# Altium PCB PCB1.pcbdoc
Units mil, origin at the board's own origin, x right, y up, seen from the top; angles counter-clockwise.
Board outline 1051.18 x 4487.6 mil, 2 copper layers (Top Layer, Bottom Layer); 40 components, 26 nets, 135 pads, 41 vias.
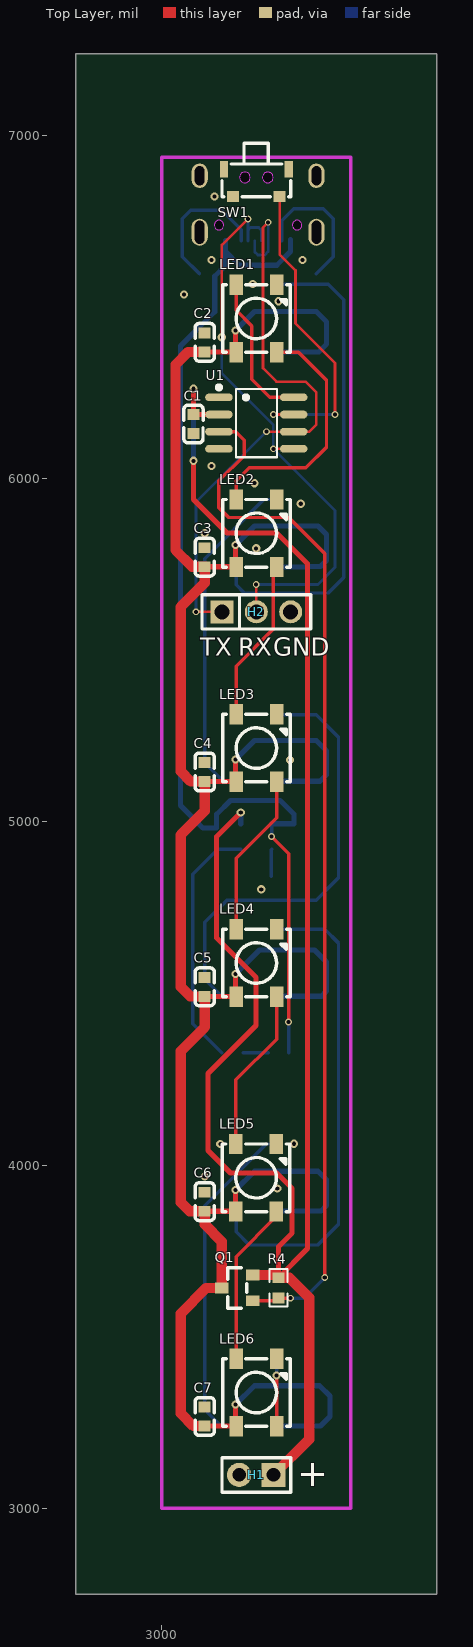
[diagram p0: Top Layer view]
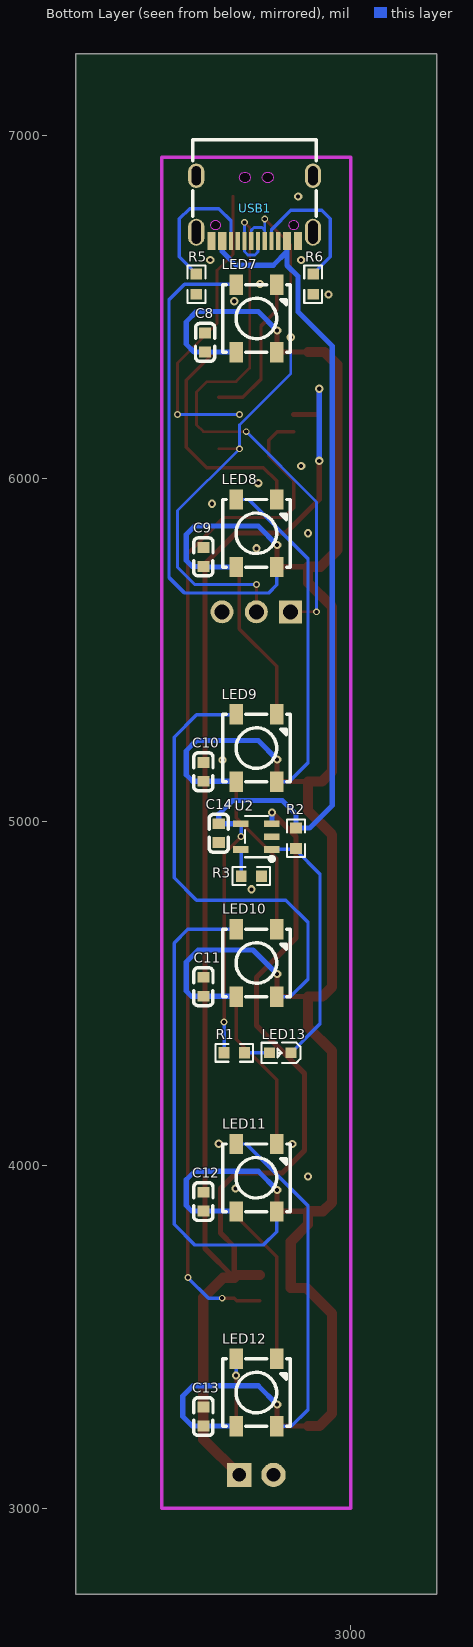
[diagram p1: Bottom Layer view, seen from below]

## Layer stack, top to bottom
Top Layer: signal copper (thickness not stored)
Dielectric: dielectric 12.6, FR-4, Dk 4.8
Bottom Layer: signal copper (thickness not stored)

## Board outline
3801.18,2750 2750,2750 2750,7237.6 3801.18,7237.6

## Components (designator, comment, footprint, x,y, rotation, side; value= is the part's Value field where it differs from the comment)
C1 "CAP_0603" C0603 3092.44,6159.57 r90 top
C2 "CAP_0603" C0603 3125,6397.01 r270 top
C3 "CAP_0603" C0603 3125,5771.01 r270 top
C4 "CAP_0603" C0603 3125,5145.01 r270 top
C5 "CAP_0603" C0603 3125,4519.01 r270 top
C6 "CAP_0603" C0603 3125,3893.01 r270 top
C7 "CAP_0603" C0603 3125,3267.01 r270 top
C8 "CAP_0603" C0603 3425,6397.01 r270 bottom
C9 "CAP_0603" C0603 3430,5772.01 r270 bottom
C10 "CAP_0603" C0603 3430,5145.76 r270 bottom
C11 "CAP_0603" C0603 3430,4519.51 r270 bottom
C12 "CAP_0603" C0603 3430,3893.26 r270 bottom
C13 "CAP_0603" C0603 3430,3267.01 r270 bottom
C14 "CAP_0603" C0603 3385,4967.01 r90 bottom
H1 "HDR-M_2.54_1x2P" HDR-TH_2P-P2.54-V-M-1 3275.59,3097.01 r180 top
H2 "HDR-M_2.54_1x3P" HDR-TH_3P-P2.54-V-M 3275.59,5612.01 r0 top
LED1 "XL-5050RGBC-WS2812B" LED-SMD_4P-L5.0-W5.0-BL_XL-5050RGBC 3275.59,6467.01 r0 top
LED2 "XL-5050RGBC-WS2812B" LED-SMD_4P-L5.0-W5.0-BL_XL-5050RGBC 3275.59,5841.01 r0 top
LED3 "XL-5050RGBC-WS2812B" LED-SMD_4P-L5.0-W5.0-BL_XL-5050RGBC 3275.59,5215.01 r0 top
LED4 "XL-5050RGBC-WS2812B" LED-SMD_4P-L5.0-W5.0-BL_XL-5050RGBC 3275.59,4589.01 r0 top
LED5 "XL-5050RGBC-WS2812B" LED-SMD_4P-L5.0-W5.0-BL_XL-5050RGBC 3275,3963.01 r0 top
LED6 "XL-5050RGBC-WS2812B" LED-SMD_4P-L5.0-W5.0-BL_XL-5050RGBC 3275.59,3337.01 r0 top
LED7 "XL-5050RGBC-WS2812B" LED-SMD_4P-L5.0-W5.0-BL_XL-5050RGBC 3275.59,6467.01 r180 bottom
LED8 "XL-5050RGBC-WS2812B" LED-SMD_4P-L5.0-W5.0-BL_XL-5050RGBC 3275.59,5841.01 r180 bottom
LED9 "XL-5050RGBC-WS2812B" LED-SMD_4P-L5.0-W5.0-BL_XL-5050RGBC 3275.59,5215.01 r180 bottom
LED10 "XL-5050RGBC-WS2812B" LED-SMD_4P-L5.0-W5.0-BL_XL-5050RGBC 3275.59,4589.01 r180 bottom
LED11 "XL-5050RGBC-WS2812B" LED-SMD_4P-L5.0-W5.0-BL_XL-5050RGBC 3275.59,3963.01 r180 bottom
LED12 "XL-5050RGBC-WS2812B" LED-SMD_4P-L5.0-W5.0-BL_XL-5050RGBC 3275.59,3337.01 r180 bottom
LED13 "LED_0603-R" LED_0603 3207.9,4326.81 r0 bottom
Q1 "AO3401A_P" AO3401A_SOT-23-3 3220,3642.01 r0 top
R1 "Res_0603" R0603 3340,4327.01 r180 bottom
R2 "Res_0603" R0603 3160,4952.01 r270 bottom
R3 "Res_0603" R0603 3290,4842.01 r0 bottom
R4 "Res_0603" R0603 3340,3642.01 r90 top
R5 "Res_0603" R0603 3450.34,6567.01 r90 bottom
R6 "Res_0603" R0603 3110,6567.01 r90 bottom
SW1 "TS-KG86E-ACT35F" SW-SMD_TS-KG86EV-ART35 3275.59,6862.01 r0 top
U1 "STC8G1K08-36I-SOP8" SOP-8_L5.0-W4.0-P1.27-LS6.0-BL 3275.59,6162.01 r270 top
U2 "LTC4054ES5-4.2#PBF" SOT-23-5_L3.0-W1.7-P0.95-LS2.8-BL 3275.59,4957.01 r90 bottom
USB1 "USB_TYPE-C-16P" USB_TYPE-C-16P 3275.59,6787.6 r0 bottom

## Footprints (in the part's own frame and the unit in brackets; to place one, negate y for a bottom-side part, rotate by r counter-clockwise, add the part's x,y. Pads: shape width x height; smd on the part's side, far side on the other; paste and mask are expansions set on the pad)
AO3401A_SOT-23-3 [mm]
  rect 1x0.8 smd: 1(1.15,-0.95) 2(1.15,0.95) 3(-1.15,0)
  silkscreen extent -0.7,-1.5 0.7,1.5
C0603 [mm]
  rect 0.8x0.9 smd: 1(-0.7,0) 2(0.7,0)
  silkscreen extent -1.41,-0.71 1.39,0.72
HDR-TH_2P-P2.54-V-M-1 [mm]
  rect 1.8x1.8 hole 1: 1(-1.27,0)
  round 1.8 hole 1: 2(1.27,0)
  silkscreen extent -2.54,-1.27 2.54,1.27
HDR-TH_3P-P2.54-V-M [mm]
  rect 1.7x1.7 hole 1.1: 1(-2.54,0)
  round 1.7 hole 1.1: 2(0,0) 3(2.54,0)
  silkscreen extent -4.02,-1.27 4.02,1.27
LED-SMD_4P-L5.0-W5.0-BL_XL-5050RGBC [mm]
  rect 1x1.5 smd: 1(-1.5,-2.5) 2(1.5,-2.5) 3(1.5,2.5) 4(-1.5,2.5)
  silkscreen extent -2.5,-2.5 2.5,2.5
LED_0603 [mil]
  rect 31.5x31.5 smd: 1(-33.5,-0.4) 2(29.5,-0.2)
  silkscreen extent -61,-30 53,30
R0603 [mil]
  rect 31.75x34.02 smd: 1(-29.66,0) 2(29.66,0)
  silkscreen extent -55,-26 55,26
SOP-8_L5.0-W4.0-P1.27-LS6.0-BL [mil]
  oval 22.6x80.14 smd: 1(-75,-108.97) 2(-25,-108.97) 3(25,-108.97) 4(75,-108.97) 5(75,108.97) 6(25,108.97) 7(-25,108.97) 8(-75,108.97)
  silkscreen extent -110,-115 99,60
SOT-23-5_L3.0-W1.7-P0.95-LS2.8-BL [mm]
  rect 0.49x1.157 smd: 1(-0.95,-1.154) 2(0,-1.154) 3(0.95,-1.154)
  rect 0.49x1.175 smd: 4(0.95,1.154) 5(-0.95,1.154)
  silkscreen extent -1.8,-1.29 1.53,0.85
SW-SMD_TS-KG86EV-ART35 [mm]
  rect 0.9x0.8 smd: 1(-1.725,-1) 2(1.725,-1)
  rect 0.6x1.2 smd: 3(-2.4,1) 4(2.4,1)
  Multi-Layer board cut-out: -0.45,0.4 -0.489,0.574 -0.6,0.713 -0.761,0.79 -0.939,0.79 -1.099,0.713 -1.21,0.574 -1.25,0.4 -1.25,0.4 -1.21,0.227 -1.099,0.087 -0.939,0.01 -0.761,0.01 -0.601,0.087 -0.49,0.226 -0.45,0.4
  Multi-Layer board cut-out: 1.25,0.4 1.211,0.574 1.1,0.713 0.939,0.79 0.761,0.79 0.601,0.713 0.49,0.574 0.45,0.4 0.45,0.4 0.49,0.227 0.601,0.087 0.761,0.01 0.939,0.01 1.1,0.087 1.211,0.226 1.25,0.4
  Multi-Layer keep-out region: -0.45,0.4 -0.489,0.574 -0.6,0.713 -0.761,0.79 -0.939,0.79 -1.099,0.713 -1.21,0.574 -1.25,0.4 -1.25,0.4 -1.21,0.227 -1.099,0.087 -0.939,0.01 -0.761,0.01 -0.601,0.087 -0.49,0.226 -0.45,0.4
  Multi-Layer keep-out region: 1.25,0.4 1.211,0.574 1.1,0.713 0.939,0.79 0.761,0.79 0.601,0.713 0.49,0.574 0.45,0.4 0.45,0.4 0.49,0.227 0.601,0.087 0.761,0.01 0.939,0.01 1.1,0.087 1.211,0.226 1.25,0.4
  silkscreen extent -2.54,-1.02 2.54,2.92
USB_TYPE-C-16P [mm]
  oval 1.2x2 hole 0.7 slot 1.7 at 90 deg: 1(-4.193,1.765) 2(4.447,1.765)
  oval 1.2x1.8 hole 0.7 slot 1.4 at 90 deg: 3(-4.193,-2.415) 4(4.447,-2.415)
  rect 0.3x1.3 smd: A1(-3.223,2.415) A4(-2.423,2.415) A5(-1.123,2.415) A6(-0.123,2.415) A7(0.377,2.415) A8(1.377,2.415) A9(2.677,2.415) A12(3.477,2.415) B1(3.177,2.415) B4(2.377,2.415) B5(1.877,2.415) B6(0.877,2.415) B7(-0.623,2.415) B8(-1.623,2.415) B9(-2.123,2.415) B12(-2.923,2.415)
  Multi-Layer board cut-out: -2.413,1.235 -2.448,1.083 -2.545,0.961 -2.685,0.894 -2.841,0.894 -2.981,0.961 -3.078,1.083 -3.113,1.235 -3.113,1.235 -3.066,1.41 -2.938,1.538 -2.763,1.585 -2.588,1.538 -2.46,1.41 -2.413,1.235
  Multi-Layer board cut-out: 3.367,1.235 3.332,1.083 3.235,0.961 3.095,0.894 2.939,0.894 2.799,0.961 2.702,1.083 2.667,1.235 2.667,1.235 2.714,1.41 2.842,1.538 3.017,1.585 3.192,1.538 3.32,1.41 3.367,1.235
  Multi-Layer keep-out region: -2.413,1.235 -2.448,1.083 -2.545,0.961 -2.685,0.894 -2.841,0.894 -2.981,0.961 -3.078,1.083 -3.113,1.235 -3.113,1.235 -3.066,1.41 -2.938,1.538 -2.763,1.585 -2.588,1.538 -2.46,1.41 -2.413,1.235
  Multi-Layer keep-out region: 3.367,1.235 3.332,1.083 3.235,0.961 3.095,0.894 2.939,0.894 2.799,0.961 2.702,1.083 2.667,1.235 2.667,1.235 2.714,1.41 2.842,1.538 3.017,1.585 3.192,1.538 3.32,1.41 3.367,1.235
  silkscreen extent -4.45,-5.08 4.7,0.57

## Via types
v1: diameter 24.02, hole 12.01, Top Layer to Bottom Layer, 29 vias
v2: diameter 19.68, hole 11.81, Top Layer to Bottom Layer, 12 vias

## Nets (pads, with @x,y where several pads share a name; then routed paths per layer and width w, separated by ;. In a path a pad name is that pad's centre, name@x,y a point inside that pad or via, vN(x,y) a via of type N, cw(c..) or ccw(c..) an arc to the next point about the centre after c; other vN are vias at no path point)
$1N498: R3.2 U2.5 | length 78.2
  Bottom Layer w10: R3.2 3319.66,4918.26 U2.5
$1N559: LED13.2 R1.2 | length 72.9
  Bottom Layer w10: LED13.2 R1.2
$1N577: LED13.1 R2.2 U2.1 | length 728.8
  Bottom Layer w10: R2.2 R2.2@3162.74,4919.61 ; LED13.1 3090,4411.61 3090,4846.87 R2.2@3162.74,4919.61 ; U2.1 R2.2@3162.74,4919.61
$1N1367: LED4.2 LED5.4 | length 478.3
  Top Layer w10: LED5.4 3215.95,4247.96 3334.64,4366.65 LED4.2
$1N1526: LED2.2 LED3.4 | length 478.1
  Top Layer w10: LED3.4 3216.54,5453.55 3325,5562.01 3325,5732.94 LED2.2
$1N1539: LED3.2 LED4.4 | length 478.1
  Top Layer w10: LED4.4 3216.54,4893.55 3334.64,5011.65 LED3.2
$1N1823: LED8.4 LED9.2 | length 990.6
  Bottom Layer w10: LED9.2 3180.43,5116.58 3125,5172.01 3125,5767.01 3297.43,5939.43 LED8.4
$1N1839: LED10.4 LED11.2 | length 1415.5
  Bottom Layer w10: LED11.2 3216.54,3805.47 3255,3767.01 3455,3767.01 3515,3827.01 3515,4647.01 3475,4687.01 3335.07,4687.01 LED10.4
$1N1846: LED9.4 LED10.2 | length 1339.6
  Bottom Layer w10: LED10.2 3176.43,4490.58 3125,4542.01 3125,4707.01 3190,4772.01 3450,4772.01 3515,4837.01 3515,5247.01 3450,5312.01 3336.07,5312.01 LED9.4
$1N1960: LED1.2 LED2.4 | length 732.5
  Top Layer w10: LED2.4 3216.54,5993.55 3255,6032.01 3420,6032.01 3480,6092.01 3480,6287.01 3398.43,6368.58 LED1.2
$1N2043: LED7.4 LED8.2 | length 1418.6
  Bottom Layer w10: LED8.2 3216.54,5690.47 3240,5667.01 3485,5667.01 3530,5712.01 3530,6522.01 3485,6567.01 3336.22,6567.01 LED7.4
$1N3699: R6.2 USB1.A5 | length 419.2
  Bottom Layer w10: R6.2 3060,6646.67 3060,6757.01 3085,6782.01 3175,6782.01 3231.38,6725.63 USB1.A5
$1N3708: R5.2 USB1.B5 | length 417.5
  Bottom Layer w10: USB1.B5 3349.49,6751.5 3385,6787.01 3470,6787.01 3500,6757.01 3500,6646.33 R5.2
$1N6521: LED5.2 LED6.4 | length 477.8
  Top Layer w10: LED6.4 3216.54,3732.93 3334.05,3850.44 LED5.2
$1N6607: LED6.2 LED12.4 | length 196.8
  Top Layer w10: LED6.2 v1(3334.64,3387.01)
  Bottom Layer w10: v1(3334.64,3387.01) LED12.4
$1N6709: LED11.4 LED12.2 | length 990.6
  Bottom Layer w10: LED12.2 3173.43,3238.58 3125,3287.01 3125,3882.01 3304.43,4061.43 LED11.4
+5V: C14.2 R1.1 R2.1 U2.4 USB1.A4 USB1.A9 USB1.B4 USB1.B9 | length 3168.8
  Top Layer w10: v2(3320,4957.01) 3369.66,4907.35 v2(3369.66,4417.01)
  Bottom Layer w10: v2(3320,4957.01) 3320,4993.4 U2.4 ; R1.1 v2(3369.66,4417.01)
  Bottom Layer w15: USB1.A4@3185.85,6672.87 USB1.A4@3186.04,6672.68 ; USB1.A4@3186.04,6693.27 USB1.A4@3186.04,6672.68 ; U2.4 3384.84,4994.41 C14.2 3385,5022.01 3345,5062.01 3200,5062.01 3160,5022.01 R2.1 3120.34,4981.67 3054.49,5047.52 3054.49,6386.5 3154.39,6486.4 3154.39,6589.75 3186.04,6621.4 3186.04,6662.02 ; USB1.B4@3374.96,6696.81 3374.96,6661.6 3335.36,6622.01 3226.05,6622.01 3186.04,6662.02 ; 3186.04,6662.02 USB1.A4@3186.04,6672.68
GND: C1.1 C2.1 C3.1 C4.1 C5.1 C6.1 C7.1 C8.1 C9.1 C10.1 C11.1 C12.1 C13.1 C14.1 H1.2 H2.3 LED1.3 LED2.3 LED3.3 LED4.3 LED5.3 LED6.3 LED7.3 LED8.3 LED9.3 LED10.3 LED11.3 LED12.3 R3.1 R5.1 R6.1 SW1.1 U1.4 U2.2 USB1.A1 USB1.A12 USB1.B1 USB1.B12
  other v1: 3336.61,3932.01 3125,3967.01 3170.78,4061.41 3385,4062.01 3290,4803.42 3374.02,5180.26 3275,5797.01 3125.11,5840.96 3405,5927.01 3270,5987.01 3145,6037.01 3340,6517.01 3065,6537.01 3265,6567.01 3145,6637.01 3410,6637.01 3410,6637.01 3153.66,6822.64
PWR: Q1.1 R4.1 U1.3 | length 3022.3
  Top Layer w10: U1.3 3215,6137.01 3240,6112.01 3240,6067.01 3166.62,5993.63 3166.62,5915.39 3195,5887.01 3370,5887.01 3475,5782.01 v2(3475,3672.01) ; Q1.1 3332.26,3604.61 R4.1 3340.34,3612.01 v2(3375,3612.01)
  Bottom Layer w10: v2(3375,3612.01) 3415,3612.01 v2(3475,3672.01)
RGB: LED1.4 U1.8 | length 438.8
  Top Layer w10: LED1.4 3216.54,6490.47 3262,6445.01 3262,6290.01 3315,6237.01 U1.8
RXD: H2.2 U1.5 USB1.A7 USB1.B7 | length 1715.7
  Top Layer w8: v1(3175,6412.01) 3175,6680.95 v2(3251.06,6757.01) ; v2(3275,5692.01) 3275,5612.6 H2.2 ; v2(3325,6087.01) U1.5
  Bottom Layer w8: v1(3175,6412.01) 3175,6307.01 3325,6157.01 v2(3325,6087.01) 3505,5907.01 3505,5742.01 3455,5692.01 v2(3275,5692.01) ; USB1.B7 3251.06,6724.01 ; v2(3251.06,6757.01) 3251.06,6724.01 ; USB1.A7 3290.43,6724.01 3282.43,6732.01 3259.06,6732.01 3251.06,6724.01
SW: SW1.2 U1.7 | length 942.1
  Top Layer w8: v2(3325,6187.01) U1.7 ; SW1.2 3343.5,6653.51 3390,6607.01 3390,6452.01 3505,6337.01 v2(3505,6187.01)
  Bottom Layer w8: v2(3325,6187.01) v2(3505,6187.01)
TXD: H2.1 U1.6 USB1.A6 USB1.B6 | length 1712.7
  Top Layer w8: v2(3100,5612.01) H2.1 ; v2(3305,6137.01) U1.6 3430,6137.01 3450,6157.01 3450,6252.01 3419.34,6282.67 3334.34,6282.67 3295,6322.01 3295,6732.01 v2(3310,6747.01)
  Bottom Layer w8: v2(3100,5612.01) 3100,5932.01 v2(3305,6137.01) ; USB1.A6 3270.75,6661.26 3280,6652.01 3300.28,6652.01 3310.12,6661.85 USB1.B6 3310.12,6746.89 v2(3310,6747.01)
VBAT: C1.2 H1.1 Q1.2 R4.2 U1.2 U2.3 | length 5469
  Top Layer w15: v1(3092.44,6052.01) 3092.44,5939.57 3190,5842.01 3335,5842.01 3425,5752.01 3425,3756.67 R4.2 3340,3762.01 3380,3802.01 3380,3932.01 3335,3977.01 3200,3977.01 3135,4042.01 3135,4267.01 3275,4407.01 3275,4547.01 3160,4662.01 3160,4957.01 v1(3230,5027.01) ; v1(3092.44,6262.01) C1.2 3166.5,6187.13 U1.2
  Top Layer w30: Q1.2 3332.26,3679.41 R4.2 3372.01,3671.67 3430,3613.68 3430,3201.42 H1.1
  Bottom Layer w15: v1(3092.44,6052.01) v1(3092.44,6262.01) ; v1(3230,5027.01) 3230,4994.58 U2.3
VCC: C2.2 C3.2 C4.2 C5.2 C6.2 C7.2 C8.2 C9.2 C10.2 C11.2 C12.2 C13.2 LED1.1 LED2.1 LED3.1 LED4.1 LED5.1 LED6.1 LED7.1 LED8.1 LED9.1 LED10.1 LED11.1 LED12.1 Q1.3 | length 7754.3
  Top Layer w15: C7.2 LED6.1@3215.68,3239.45 ; C6.2 LED5.1@3215.09,3865.45 ; C5.2 LED4.1@3215.68,4491.45 ; C4.2 LED3.1@3215.68,5117.45 ; C3.2 LED2.1@3215.68,5743.45 ; C2.2 LED1.1@3215.68,6369.45 ; v1(3215,3302.01) 3215,3240.12 LED6.1@3215.68,3239.45 ; v1(3215,3927.01) 3215.09,3926.92 LED5.1@3215.09,3865.45 ; v1(3215,4557.01) 3215,4492.12 LED4.1@3215.68,4491.45 ; v1(3215,5182.01) 3215,5118.12 LED3.1@3215.68,5117.45 ; v1(3215,5807.01) 3215,5744.12 LED2.1@3215.68,5743.45 ; v1(3215,6432.01) 3215,6370.12 LED1.1@3215.68,6369.45 ; LED5.1 LED5.1@3215.09,3865.45 ; LED6.1 LED6.1@3215.68,3239.45 ; LED4.1 LED4.1@3215.68,4491.45 ; LED3.1 LED3.1@3215.68,5117.45 ; LED2.1 LED2.1@3215.68,5743.45 ; LED1.1 LED1.1@3215.68,6369.45
  Top Layer w30: C7.2 3092.28,3239.45 3055,3276.73 3055,3567.01 3130,3642.01 Q1.3 3175,3642.29 3175,3777.01 3125,3827.01 C6.2 3081.56,3865.45 3055,3892.01 3055,4332.01 3125,4402.01 C5.2 3082.57,4491.45 3055,4519.02 3055,4962.01 3125,5032.01 C4.2 3085,5117.45 3055,5147.45 3055,5626.29 3125,5696.29 C3.2 3088.56,5743.45 3040,5792.01 3040,6332.01 3077.44,6369.45 C2.2
  Bottom Layer w15: v1(3215,3302.01) 3270,3357.01 3460,3357.01 3490,3327.01 3490,3267.01 3462.44,3239.45 C13.2 3335.51,3239.45 LED12.1 ; v1(3215,3927.01) 3270,3982.01 3455,3982.01 3480,3957.01 3480,3882.01 3463.69,3865.7 C12.2 3335.76,3865.7 LED11.1 ; v1(3215,4557.01) 3285,4627.01 3445,4627.01 3480,4592.01 3480,4506.95 3465,4491.95 C11.2 3336.01,4491.95 LED10.1 ; v1(3215,5182.01) 3270,5237.01 3450,5237.01 3480,5207.01 3480,5137.01 3461.19,5118.2 C10.2 3336.26,5118.2 LED9.1 ; v1(3215,5807.01) 3270,5862.01 3455,5862.01 3480,5837.01 3480,5762.01 3462.44,5744.45 C9.2 3428.14,5742.58 LED8.1 ; v1(3215,6432.01) 3270,6487.01 3450,6487.01 3480,6457.01 3480,6392.01 3457.44,6369.45 C8.2 3335.51,6369.45 LED7.1
"": LED7.2 SW1.3 SW1.4 U1.1 USB1.1 USB1.2 USB1.3 USB1.4 USB1.A8 USB1.B8

## Polygon pours and split planes (outlines as drawn)
GND on Top Layer (solid, remove dead copper, pour order 0): 3000,3000 3551.18,3000 3551.18,6937.01 3000,6937.01
GND on Bottom Layer (solid, remove dead copper, pour order 1): 3000,3000 3551.18,3000 3551.18,6937.01 3000,6937.01

## Keep-outs
Board Outline Layer:
  lines w10 net "": 3000,3000 3551.18,3000 3551.18,6937.01 3000,6937.01 3000,3000

## Silkscreen, mask and mechanical layers (free items; w line width, h text height)
Top Silkscreen Layer:
  text "TX" at 3112.85,5484.77 h51.92
  text "RX" at 3222.85,5484.77 h51.92
  text "GND" at 3325.57,5484.77 h51.92
  text "+" at 3395,3063.36 h78.45